# Altium PCB ESP_32_finalls_ss.PcbDoc
Units mil, origin at the board's own origin, x right, y up, seen from the top; angles counter-clockwise.
Board outline 1574.8 x 1574.8 mil, 2 copper layers (Top Layer, Bottom Layer); 58 components, 45 nets, 209 pads, 217 vias.
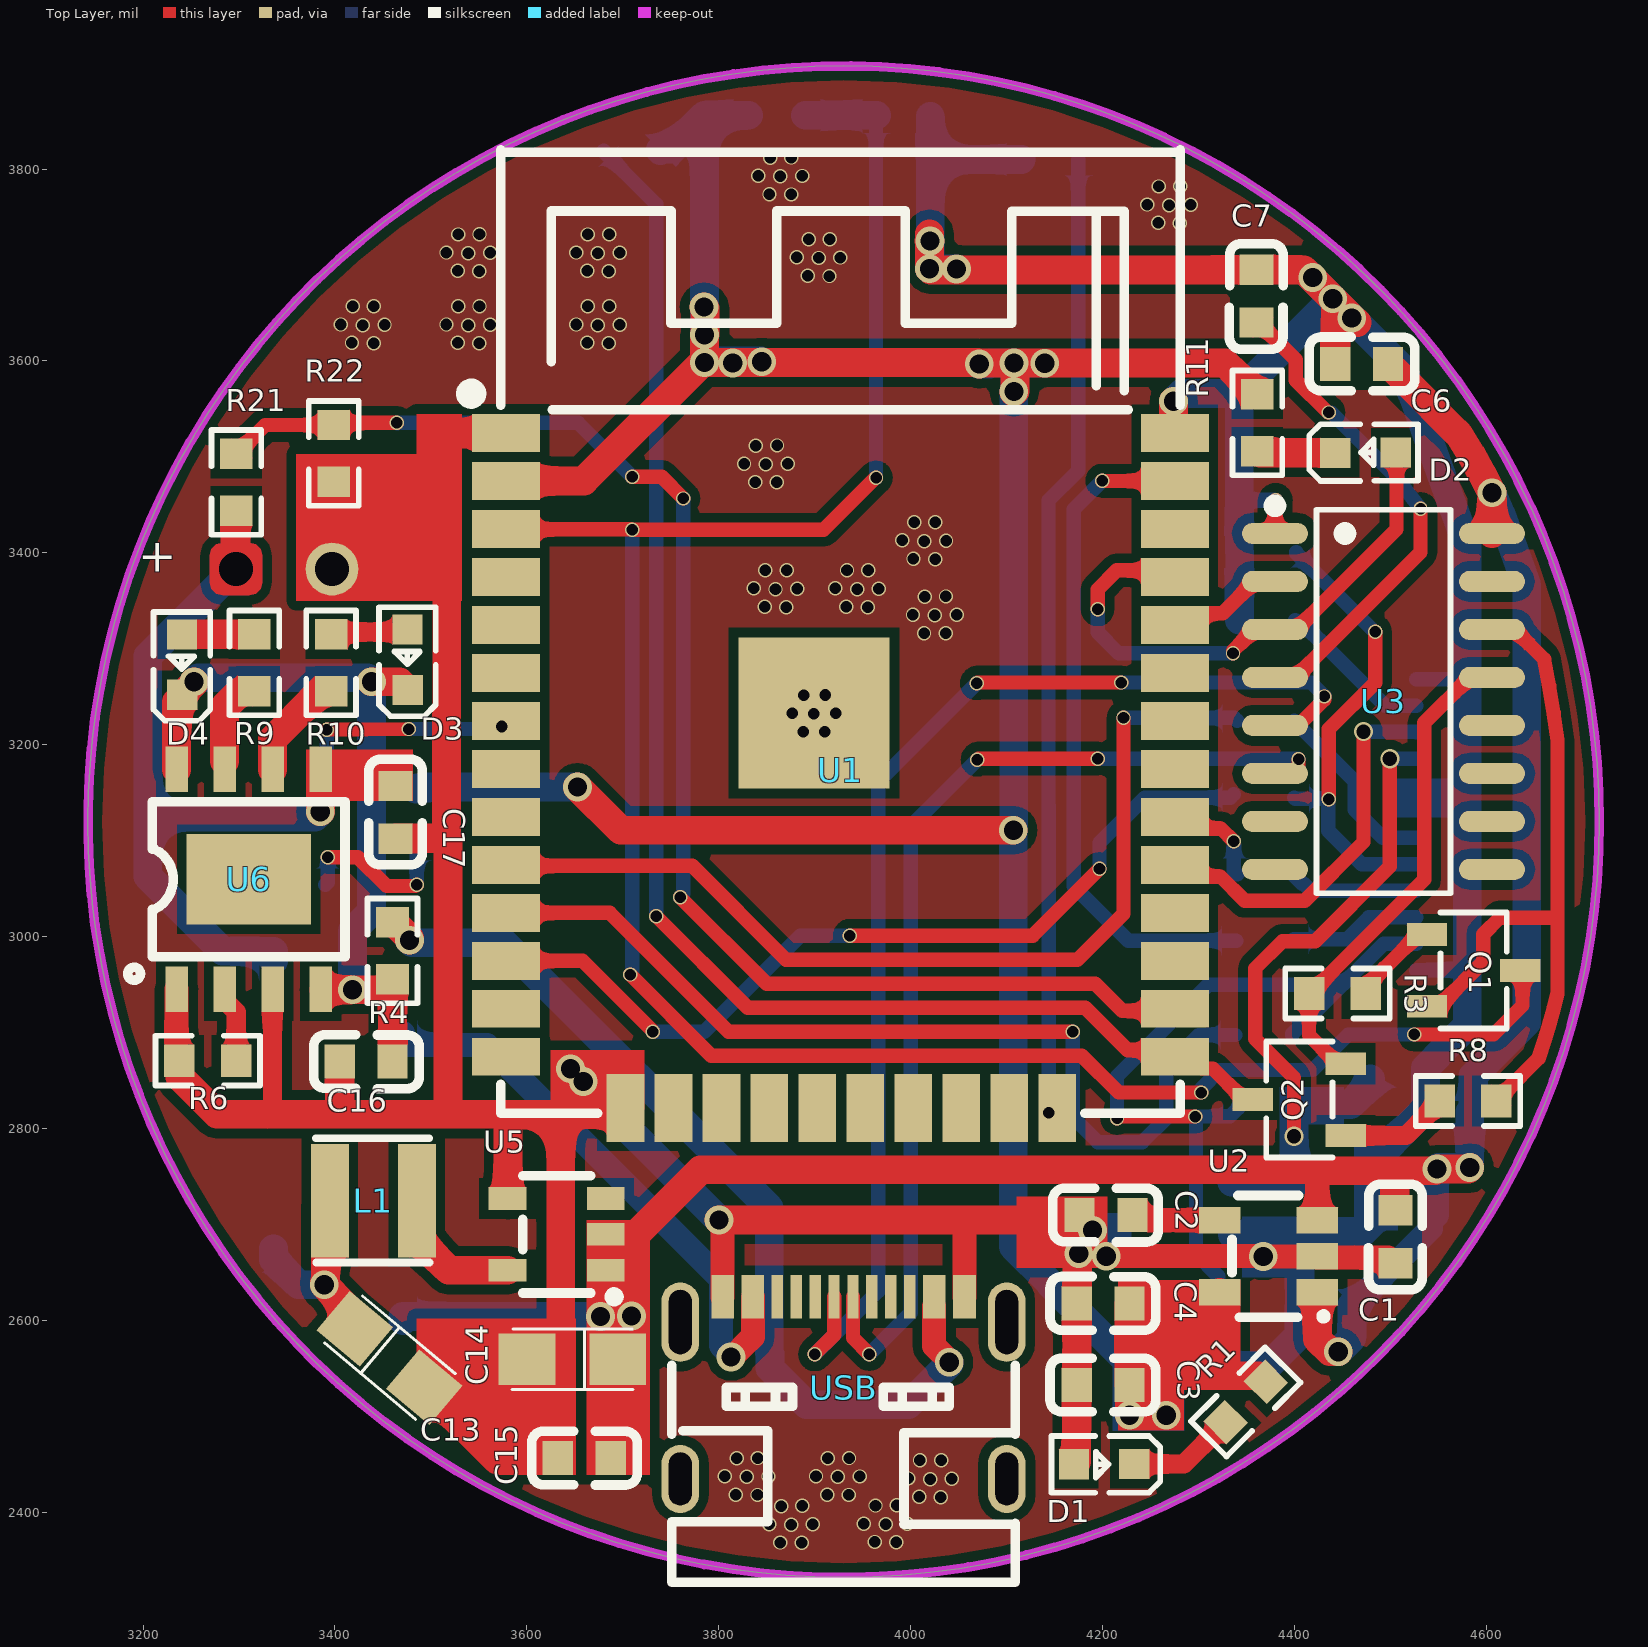
[diagram p0: Top Layer view]
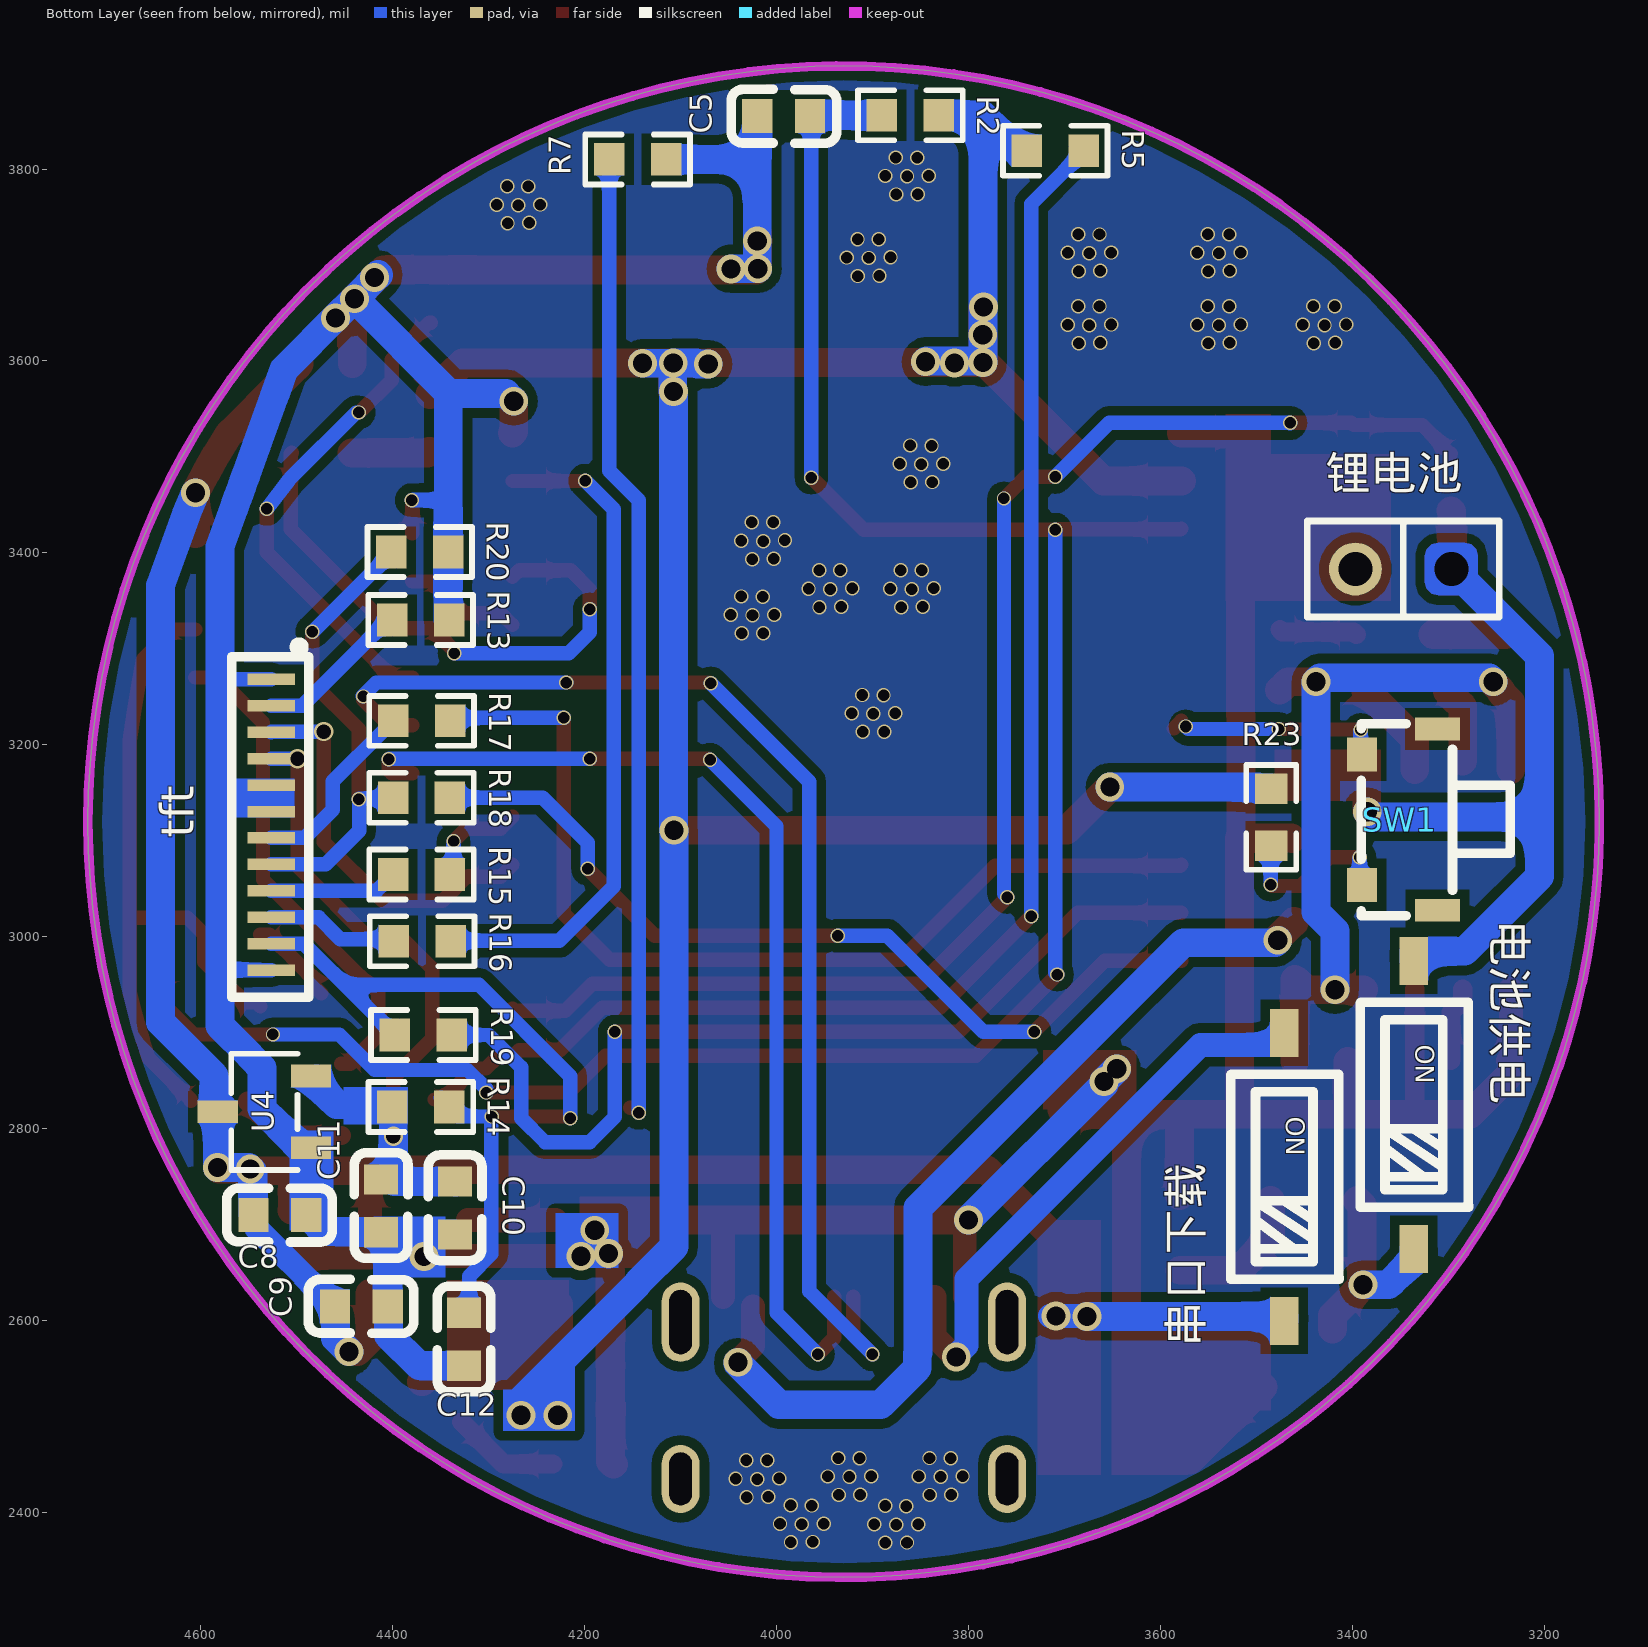
[diagram p1: Bottom Layer view, seen from below]

## Layer stack, top to bottom
Top Solder: solder mask 0.4, Solder Resist, Dk 3.5
Top Layer: signal copper 1.4
Dielectric 1: dielectric 12.6, FR-4, Dk 4.8
Bottom Layer: signal copper 1.4
Bottom Solder: solder mask 0.4, Solder Resist, Dk 3.5

## Board outline
3142.6,3120 ccw(c3930,3120) 3930,2332.6 ccw(c3930,3120) 4717.4,3120 ccw(c3930,3120) 3930,3907.4 ccw(c3930,3120)

## Design rules (kind name [scope] priority, off if disabled: settings)
Clearance [All] p1: gap=10 ignorepadtopadclearanceinfootprint=FALSE except(0: Arc-Hole Track-Hole SMDPad-Hole THPad-Hole Via-Hole Fill-Hole Poly-Hole Region-Hole Text-Hole)
PolygonConnect [All] p1: connectstyle=Relief reliefconductorwidth=10 reliefentries=4 polygonreliefangle="90 Angle" airgapwidth=10
RoutingVias [All] p1: holewidth=28 width=50 viastyle="Through Hole" minholewidth=28 minwidth=50 maxholewidth=28 maxwidth=50
SolderMaskExpansion [All] p1: expansion=4 istentingtop=FALSE
Width [All] p1: maxlimit=100 minlimit=5 preferedwidth=15 minimp=50.000000 maximp=50.000000 favimp=50.000000
30 further rules are at their usual default settings.

## Components (designator, comment, footprint, x,y, rotation, side; value= is the part's Value field where it differs from the comment)
C1 "Cap" 0603C 4502.95,2692.23 r90 top locked value=10uF
C2 "Cap" 0603C 4207.89,2712.05 r0 top value=103
C3 "Cap" 0603C 4205,2535 r0 top value=104
C4 "Cap" 0603C 4205,2620 r0 top value=10uF
C5 "Cap" 0603C 3997.22,3852.95 r0 bottom value=104
C6 "Cap" 0603C 4465,3595 r180 top value=104
C7 "Cap" 0603C 4357.95,3672.22 r90 top value=103
C8 "Cap" 0603C 4512.77,2712.05 r180 bottom value=106
C9 "Cap" 0603C 4427.9,2617.05 r180 bottom value=104
C10 "Cap" 0603C 4332.95,2712.78 r270 bottom value=106
C11 "Cap" 0603C 4410,2715 r270 bottom value=104
C12 "Cap" 0603C 4323.64,2576.04 r270 bottom locked value=104
C13 "Cap Pol1" 钽电容10uf 3460,2560 r320 top value=10uf
C14 "Cap Pol1" 钽电容10uf 3644.01,2558.86 r180 top value=10uf
C15 "Cap" 0603C 3655,2455 r180 top value=0.1uf
C16 "Cap" 0603C 3427.78,2867.95 r180 top value=10uf
C17 "Cap" 0603C 3465,3125 r270 top value=10uf
D1 "LED0" 0603_LED 4200,2455 r180 top
D2 "LED0" 0603_LED 4475,3500 r0 top
D3 "LED0" 0603_LED 3480,3290 r90 top
D4 "LED0" 0603_LED 3245,3285 r90 top locked
L1 "22uH  350mA" L3.0W3.0-22uH 3440,2725 r180 top value=22uH
Q1 "S8050" S8050 4586.06,2965.48 r180 top locked
Q2 "S8050" S8050 4405,2830 r0 top locked
R1 "Res1" 0603R 4350,2515 r45 top locked value=1K
R2 "Res1" 0603R 3860,3855 r180 bottom value=5K
R3 "Res1" 0603R 4445,2940 r0 top value=12K
R4 "Res1" 0603R 3461.01,2985.81 r90 top value=0.4R
R5 "Res1" 0603R 3710,3820 r0 bottom value=5K
R6 "Res1" 0603R 3267.89,2870.04 r0 top value=2.4k
R7 "Res1" 0603R 4144.19,3808.99 r180 bottom value=5K
R8 "Res1" 0603R 4580,2830 r180 top locked value=12K
R9 "Res1" 0603R 3315,3285 r270 top locked value=1K
R10 "Res1" 0603R 3395,3285 r270 top value=1K
R11 "Res1" 0603R 4360,3535 r270 top value=470R
R13 "Res1" 0603R 4371.21,3331.09 r0 bottom value=2R
R14 "Res1" 0603R 4371.05,2823.69 r0 bottom locked value=10K
R15 "Res1" 0603R 4369.4,3063.93 r180 bottom value=1K
R16 "Res1" 0603R 4368.78,2994.46 r180 bottom value=1K
R17 "Res1" 0603R 4369.19,3223.99 r180 bottom value=1K
R18 "Res1" 0603R 4369.41,3143.99 r180 bottom value=1K
R19 "Res1" 0603R 4367.38,2896.75 r180 bottom value=1K
R20 "Res1" 0603R 4372.19,3401.93 r0 bottom value=51K
R21 "Res1" 0603R 3296.21,3473.06 r270 top value=3.9K
R22 "Res1" 0603R 3399.72,3504.11 r90 top value=1K
R23 "Res1" 0603R 3483.54,3125 r90 bottom value=5K
SW1 "TS-KG86E-ACT35F" switch 3335.75,3123.39 r270 bottom locked
tft "1.28tft 240*240-SPI" 1.28tft_12P 4642.38,3147 r270 bottom locked
U1 "ESP32_Core" ESP32-WROOM-32 3899.03,3241.39 r0 top locked
U2 "CAT6219-330TDGT3" CAT6219-330TD 4370,2665 r0 top locked
U3 "CH340C" CH340C 4490,3260 r270 top locked
U4 "XC6206P332MR_C5446" XC6206P332MR 4538.31,2817.12 r180 bottom locked
U5 "ME2188C50M5G" R-ME2188C50M5G 3640,2690 r0 top
U6 "TP4056_C725790" TP4056 3304.01,3056.88 r0 top
USB "TYPEC-304-ACP16" TYPE-C-16P 3941.3,2492.75 r0 top locked
串口下载 "DSHP01TSGER" dial_1 3470,2750 r180 bottom (schematic designator dial_2)
电池供电 "DSHP01TSGER" dial_1 3335,2825 r180 bottom (schematic designator dial_1)
锂电池 "CON2" SIP-2 3351.87,3388.23 r0 bottom (schematic designator J1)

## Footprints (in the part's own frame and the unit in brackets; to place one, negate y for a bottom-side part, rotate by r counter-clockwise, add the part's x,y. Pads: shape width x height; smd on the part's side, far side on the other; paste and mask are expansions set on the pad)
1.28tft_12P [mm]
  rect 0.3x1.25 smd paste+0 mask+0.05: 1(-3.08,2.944) 2(-2.382,2.944) 3(-1.682,2.944) 4(-0.979,2.944) 5(-0.28,2.944) 6(0.419,2.944) 7(1.115,2.944) 8(1.813,2.944) 9(2.512,2.944) 10(3.216,2.944) 11(3.914,2.944) 12(4.614,2.944)
  silkscreen extent -4.06,1.9 5.33,3.94
0603_LED [mm]
  rect 0.8x0.8 smd: 1(-0.834,0.107) 2(0.765,0.114)
  silkscreen extent -1.52,-0.64 1.36,0.87
0603C [mm]
  rect 0.8x0.9 smd: 1(-0.819,-0.052) 2(0.582,-0.052)
  silkscreen extent -1.52,-0.76 1.27,0.66
0603R [mil]
  rect 31.75x34.02 smd paste-3937.01 mask+2: 1(-30.13,1.01) 2(29.19,1.01)
  silkscreen extent -55,-25 54,27
CAT6219-330TD [mm]
  rect 1.1x0.7 smd: 1(1.36,-0.897) 2(1.36,0.053) 3(1.36,1.005) 4(-1.228,1.005) 5(-1.228,-0.895)
  silkscreen extent -0.9,-1.6 1.59,1.66
CH340C [mm]
  oval 0.56x1.745 smd: 1(-4.071,-2.81) 2(-2.801,-2.81) 3(-1.531,-2.81) 4(-0.261,-2.81) 5(1.009,-2.81) 6(2.279,-2.81) 7(3.549,-2.81) 8(4.819,-2.81) 9(4.819,2.934) 10(3.549,2.934) 11(2.279,2.934) 12(1.009,2.934) 13(-0.261,2.934) 14(-1.531,2.934) 15(-2.801,2.934) 16(-4.071,2.934)
  silkscreen extent -4.95,-2.96 5.45,1.83
dial_1 [mm]
  rect 0.76x1.27 smd paste+0 mask+0.05: 1(-0.024,3.81) 2(-0.024,-3.81)
  silkscreen extent -1.44,-2.71 1.43,2.71
ESP32-WROOM-32 [mm]
  rect 1.8x1.001 smd: 1(-8.152,7.204) 2(-8.152,5.934) 3(-8.152,4.664) 4(-8.152,3.394) 5(-8.152,2.124) 6(-8.152,0.854) 7(-8.152,-0.416) 8(-8.152,-1.686) 9(-8.152,-2.956) 10(-8.152,-4.226) 11(-8.152,-5.496) 12(-8.152,-6.766) 13(-8.152,-8.036) 14(-8.152,-9.306) 25(9.55,-9.306) 26(9.55,-8.036) 27(9.55,-6.766) 28(9.55,-5.496) 29(9.55,-4.226) 30(9.55,-2.956) 31(9.55,-1.686) 32(9.55,-0.416) 33(9.55,0.854) 34(9.55,2.124) 35(9.55,3.394) 36(9.55,4.664) 37(9.55,5.934) 38(9.55,7.204)
  rect 1.001x1.8 smd: 15(-4.991,-10.657) 16(-3.721,-10.657) 17(-2.451,-10.657) 18(-1.181,-10.657) 19(0.089,-10.657) 20(1.359,-10.657) 21(2.629,-10.657) 22(3.899,-10.657) 23(5.169,-10.657) 24(6.439,-10.657)
  rect 4x4 smd: 39(-0.001,-0.207)
  silkscreen extent -9.27,-10.8 9.69,14.7
L3.0W3.0-22uH [mm]
  rect 1x3 smd: 1(1.149,-0.004) 2(-1.151,-0.004)
  silkscreen extent -1.49,-1.65 1.52,1.63
R-ME2188C50M5G [mm]
  rect 1x0.6 smd: 1(1.068,-0.95) 2(1.068,0) 3(1.068,0.95) 4(-1.532,0.95) 5(-1.532,-0.95)
  silkscreen extent -1.13,-1.78 1.42,1.55
S8050 [mm]
  rect 1.07x0.6 smd: 1(1.227,-0.938) 2(1.227,0.962) 3(-1.243,0.012)
  silkscreen extent -0.88,-1.52 0.87,1.55
SIP-2 [mil]
  round 0 hole 35.43: 1(-55,5)
  round 55.12 hole 35.43: 2(45,5)
  Top Layer region: -82.56,18.78 -80.71,25.67 -75.67,30.71 -68.78,32.56 -41.22,32.56 -34.33,30.71 -29.29,25.67 -27.44,18.78 -27.44,-8.78 -29.29,-15.67 -34.33,-20.71 -41.22,-22.56 -68.78,-22.56 -75.67,-20.71 -80.71,-15.67 -82.56,-8.78
  Bottom Layer region: -82.56,18.78 -80.71,25.67 -75.67,30.71 -68.78,32.56 -41.22,32.56 -34.33,30.71 -29.29,25.67 -27.44,18.78 -27.44,-8.78 -29.29,-15.67 -34.33,-20.71 -41.22,-22.56 -68.78,-22.56 -75.67,-20.71 -80.71,-15.67 -82.56,-8.78
  silkscreen extent -105,-45 95,55
switch [mm]
  rect 0.9x0.8 smd paste+0 mask+0.05: 1(-1.692,-1.378) 2(1.758,-1.378)
  rect 0.6x1.2 smd paste+0 mask+0.05: 3(-2.367,0.622) 4(2.433,0.622)
  silkscreen extent -2.51,-1.39 2.57,2.54
TP4056 [mm]
  rect 0.6x1.2 smd: 1(-1.753,-2.829) 2(-0.483,-2.829) 3(0.787,-2.829) 4(2.057,-2.829) 5(2.057,2.988) 6(0.787,2.988) 7(-0.483,2.988) 8(-1.753,2.988)
  rect 3.3x2.4 smd: 9(0.152,0.079)
  silkscreen extent -3.05,-2.59 2.7,2.13
TYPE-C-16P [mm]
  rect 0.6x1.15 smd paste-100 mask+0.05: A1B12(-3.491,3.359) A4B9(-2.691,3.359) B1A12(2.909,3.359) B4A9(2.109,3.359)
  rect 0.3x1.15 smd paste-100 mask+0.05: A5(-1.541,3.359) A6(-0.541,3.359) A7(-0.041,3.359) A8(0.959,3.359) B5(1.459,3.359) B6(0.459,3.359) B7(-1.041,3.359) B8(-2.041,3.359)
  oval 1x1.8 hole 0.6 slot 1.4 at 90 deg paste+0 mask+0.05: EP(-4.611,-1.461) EP(4.029,-1.461)
  oval 1x2.1 hole 0.6 slot 1.7 at 90 deg paste+0 mask+0.05: EP(-4.611,2.689) EP(4.029,2.689)
  silkscreen extent -4.84,-4.19 4.26,1.54
XC6206P332MR [mm]
  rect 1.07x0.6 smd: 1(1.354,-0.938) 2(1.354,0.962) 3(-1.116,0.012)
  silkscreen extent -0.76,-1.52 1,1.55
钽电容10uf [mil]
  rect 59.05x53.5 smd: 1(-50.47,-1.14) 2(44.01,-1.14)
  silkscreen extent -66,-33 60,30

## Part data
C1 C2 C3 C4 C5 C6 C7 C8 C9 C10 C11 C12 C15 C16 C17: "Capacitor", LatestRevisionDate=17-Jul-2002, LatestRevisionNote="Re-released for DXP Platform.", PackageDescription="Radial Cap, Thru-Hole; 2 Leads; 0.3 in Pin Spacing", PackageReference=RAD-0.3, Published=8-Jun-2000, Publisher="Altium Limited"
C13 C14: "Polarized Capacitor (Radial)", LatestRevisionDate=17-Jul-2002, LatestRevisionNote="Re-released for DXP Platform.", PackageDescription="Polarized Capacitor (Radial); 2 Leads", PackageReference=RB7.6-15, Published=8-Jun-2000, Publisher="Altium Limited"
D1 D2 D3 D4: "Typical INFRARED GaAs LED", LatestRevisionDate=08-Jul-2005, LatestRevisionNote="Mech Layer 1 removed.", PackageDescription="LED; 2 Leads", PackageReference=LED-0, Published=8-Jun-2000, Publisher="Altium Limited"
L1: library part ABG06A45M220, DC Resistance (DCR)=110mΩ, JLCPCB Part Class="Extended Part", LCSC Part Name="22uH ±20% 1.85A 110mΩ", Manufacturer=Coilank(驰兴电感), Rated Current=1.85A, Tolerance=±20%, Add into BOM=yes, Convert to PCB=yes, Datasheet=https://atta.szlcsc.com/upload/public/pdf/source/20180803/C253595_25210E544AC881D442365BBE1C43CE23.pdf, Device=ABG06A45M220, Manufacturer Part=ABG06A45M220, Name=22uH, Supplier=LCSC, Supplier Footprint=SMD, Supplier Part=C253595, Symbol=ABG06A45M220
Q1 Q2: library part S8050_C105433, Collector Current (Ic)=500mA, Collector Cut-Off Current (Icbo)=100nA, Collector-Emitter Breakdown Voltage (Vceo)=25V, Collector-Emitter Saturation Voltage (VCE(sat)@Ic,Ib)=600mV@500mA,50mA, DC Current Gain (hFE@Ic,Vce)=120@50mA,1V, JLCPCB Part Class="Extended Part", LCSC Part Name="NPN 25V 500mA L档 120-200", Manufacturer=CJ(江苏长电/长晶), Operating Temperature=+150℃@(Tj), Power Dissipation (Pd)=300mW, Transition Frequency (fT)=150MHz, Add into BOM=yes, Convert to PCB=yes, Datasheet=https://atta.szlcsc.com/upload/public/pdf/source/20170415/1492237762328.pdf, Device=S8050_C105433, Manufacturer Part=S8050, Name=S8050, Supplier=LCSC, Supplier Footprint=SOT-23, Supplier Part=C105433, Symbol=S8050_C105433, Transistor Type=NPN
R1 R2 R3 R4 R5 R6 R7 R8 R9 R10 R11 R13 R14 R15 R16 R17 R18 R19 R20 R21 R22 R23: "Resistor", LatestRevisionDate=17-Jul-2002, LatestRevisionNote="Re-released for DXP Platform.", PackageDescription="Axial Device, Thru-Hole; 2 Leads; 0.3 in Pin Spacing", PackageReference=AXIAL-0.3, Published=8-Jun-2000, Publisher="Altium Limited"
SW1: JLCPCB Part Class="Extended Part", Manufacturer=HANBO(汉博), Add into BOM=yes, Convert to PCB=yes, Datasheet=https://atta.szlcsc.com/upload/public/pdf/source/20210816/314DDF736145A1D10B89E80ED474C2FA.pdf, Device=TS-KG86E-ACT35F, LCSC Part Name=TS-KG86E-ACT35F, Manufacturer Part=TS-KG86E-ACT35F, Name=TS-KG86E-ACT35F, Supplier=LCSC, Supplier Footprint=-, Supplier Part=C2874419, Symbol=TS-KG86E-ACT35F
U2: Dropout Voltage=500mV@(500mA), JLCPCB Part Class="Extended Part", LCSC Part Name="输入5.5V 输出3.3V 500mA", Manufacturer=onsemi(安森美), Maximum Input Voltage=5.5V, Output Current=500mA, Output Voltage=3.3V, Power Supply Rejection Ratio (PSRR)=64dB, Add into BOM=yes, Convert to PCB=yes, Datasheet=https://atta.szlcsc.com/upload/public/pdf/source/20181211/C255621_E1C92A84280A25A34B7AFA26C33FFBB6.pdf, Device=CAT6219-330TDGT3, Manufacturer Part=CAT6219-330TDGT3, Name=CAT6219-330TDGT3, Number of Outputs=1, Output Polarity=正, Output Type=固定, Supplier=LCSC, Supplier Footprint=TSOT-23-5, Supplier Part=C255621, Symbol=CAT6219-330TDGT3
U3: JLCPCB Part Class="Extended Part", LCSC Part Name="CH340C USB转串口芯片 CH340", Manufacturer=WCH(南京沁恒), Supply Voltage=3.3V；5V, Add into BOM=yes, Applications Function=收发器, Convert to PCB=yes, Data Rate=2Mbps, Datasheet=https://atta.szlcsc.com/upload/public/pdf/source/20200819/C84681_ADBED554CE321879DBD6B1D06488689C.pdf, Device=CH340C, Manufacturer Part=CH340C, Name=CH340C, Protocol="USB 2.0", Supplier=LCSC, Supplier Footprint=SOP-16, Supplier Part=C84681, Symbol=CH340C
U4: Dropout Voltage=680mV@(100mA), JLCPCB Part Class="Basic Part", LCSC Part Name=XC6206P332MR, Manufacturer=TOREX(特瑞仕), Maximum Input Voltage=6V, Output Current=200mA, Output Voltage=3.3V, Power Supply Rejection Ratio (PSRR)=-, Add into BOM=yes, Convert to PCB=yes, Datasheet=https://atta.szlcsc.com/upload/public/pdf/source/20130801/1457706628791.pdf, Device=XC6206P332MR_C5446, Manufacturer Part=XC6206P332MR, Name=XC6206P332MR, Number of Outputs=1, Output Polarity=正, Output Type=固定, Supplier=LCSC, Supplier Footprint=SOT-23-3L, Supplier Part=C5446, Symbol=XC6206P332MR
U5: Input Voltage=0.9V~5V, JLCPCB Part Class="Extended Part", LCSC Part Name="升压型 Vin=0.9V~5V Vout=5V 300mA", Manufacturer=MICRONE(南京微盟), Output Current (Max)=300mA, Output Voltage=5V, Switching Frequency=320kHz, Add into BOM=yes, Convert to PCB=yes, Datasheet=https://atta.szlcsc.com/upload/public/pdf/source/20180904/C236768_E7AD8C2FE568D006CA38E8CDC667E81C.pdf, Device=ME2188C50M5G, Function=升压型, Manufacturer Part=ME2188C50M5G, Name=ME2188C50M5G, Number of Outputs=1, Supplier=LCSC, Supplier Footprint=SOT-23-5, Supplier Part=C236768, Symbol=ME2188C50M5G, Synchronous Rectification=是, Topology=升压式
U6: JLCPCB Part Class="Extended Part", LCSC Part Name=TP4056, Manufacturer=UMW(友台半导体), Add into BOM=yes, Convert to PCB=yes, Datasheet=https://atta.szlcsc.com/upload/public/pdf/source/20211011/37515E71BA298E23D23475482C49633D.pdf, Device=TP4056_C725790, Manufacturer Part=TP4056, Name=TP4056, Supplier=LCSC, Supplier Footprint=ESOP-8, Supplier Part=C725790, Symbol=TP4056_C725790
USB: Current Rating - Power (Max)=3A, JLCPCB Part Class="Extended Part", LCSC Part Name="Type-C 母座 卧贴", Manufacturer=XUNPU(讯普), Operating Temperature Range=-40℃~+85℃, Add into BOM=yes, Connector Type=Type-C, Convert to PCB=yes, Device=TYPEC-304-ACP16, Gender=母座, Manufacturer Part=TYPEC-304-ACP16, Mounting Style=卧贴, Name=TYPEC-304-ACP16, Number of Contacts=16, Number of Ports=1, Supplier=LCSC, Supplier Footprint=SMD, Supplier Part=C2982555, Symbol=TYPEC-304-ACP16
串口下载 电池供电: JLCPCB Part Class="Extended Part", LCSC Part Name="1位单PIN 1.27mm间距贴片型 KE拨码开关 编码开关", Manufacturer=康深, Add into BOM=yes, Convert to PCB=yes, Datasheet=https://atta.szlcsc.com/upload/public/pdf/source/20220713/BDDC0447A52B6A23E8804DA200FD4C7C.pdf, Device=DSHP01TSGER, Manufacturer Part=DSHP01TSGER, Name=DSHP01TSGER, Supplier=LCSC, Supplier Footprint=SMD,2.9x5.4mm, Supplier Part=C3293141, Symbol=DSHP01TSGER
锂电池: library part "Header 2H", "Header, 2-Pin, Right Angle", LatestRevisionDate=17-Jul-2002, LatestRevisionNote="Re-released for DXP Platform.", Publisher="Altium Limited"

## Via types
v1: diameter 15, hole 12, Top Layer to Bottom Layer, 173 vias
v2: diameter 30, hole 20, Top Layer to Bottom Layer, 41 vias
v3: diameter 20, hole 15, Top Layer to Bottom Layer, 3 vias

## Nets (pads, with @x,y where several pads share a name; then routed paths per layer and width w, separated by ;. In a path a pad name is that pad's centre, name@x,y a point inside that pad or via, vN(x,y) a via of type N, cw(c..) or ccw(c..) an arc to the next point about the centre after c; other vN are vias at no path point)
+3.3V_S: C10.1 C11.1 R14.2 tft.4 U4.2 | length 715.3
  Top Layer w15: v3(4399.16,2792.29) 4399.16,2853.29 4358.62,2893.84 4358.62,2966.99 4387.19,2995.57 4421.43,2995.57 4499.11,3073.24 v3(4499.11,3185.51)
  Bottom Layer w15: v3(4499.11,3185.51) tft.4
  Bottom Layer w30: C10.1@4334.25,2744.25 C10.1 4398.02,2745 4399.16,2746.14 v3(4399.16,2792.29) v3@4399.44,2792.01 ; v3@4399.32,2792.29 4399.32,2821.76 R14.2 ; C11.1@4409.33,2747.97 4410.08,2747.22 C11.1 ; 4440,2825 4458.17,2825 4478.94,2845.76 U4.2@4478.94,2851.81
ADC1: R21.1 R22.2 U1.26 | length 1495.3
  Top Layer w15: R21.1 3298.35,3503.18 3306.73,3511.56 3306.73,3512.69 3327.34,3533.3 R22.2 3400.89,3535.48 v1(3464.52,3535.48) ; v1(3709.55,3479.21) 3740.53,3479.21 v1(3763,3456.74) ; v1(3759.55,3041.46) 3759.55,3041.32 3849.75,2951.12 4191.96,2951.12 4220.19,2922.89 4272.89,2922.89 U1.26
  Bottom Layer w15: v1@3465,3535 v1(3464.52,3535.48) 3653.28,3535.48 v1(3709.55,3479.21) ; v1(3759.55,3041.46) 3763,3044.9 v1(3763,3456.74)
BAT+: C17.1 R21.2 U6.5 电池供电.1 锂电池.1 | length 846.8
  Top Layer w15: 3414.31,3157.01 3425.64,3168.33
  Top Layer w30: 3291.43,3388.67 锂电池.1 3296.39,3383.71 3296.39,3443.03 R21.2 ; v2(3384.59,3130.32) 3385,3130.73 3385,3156.67 3388.33,3160 3405,3160
  Bottom Layer w30: 锂电池.1 3295.66,3383.23 3205,3292.57 3205,3125 ; 电池供电.1 3335.95,2984.96 3335.91,2985 3283.07,2985 3205,3063.07 3205,3125 ; v2(3384.59,3130.32) 3379.27,3125 3205,3125
BL: tft.3 U1.29 | length 407.7
  Top Layer w15: U1.29 4287.2,3062.8 4322.57,3062.8 4347.86,3037.51 4410.27,3037.51 4471.61,3098.85 v3(4471.61,3213.84)
  Bottom Layer w15: v3(4471.61,3213.84) 4471.91,3213.54 4526.18,3213.54 tft.3
CS: R18.2 U1.12 | length 907.7
  Top Layer w15: U1.12 3657.93,2975 3731.26,2901.67 v1(3731.26,2901.15) ; v1(3936.33,3001.12) 4126.81,3001.12 v1(4196.55,3070.86)
  Bottom Layer w15: v1(3731.26,2901.15) 3784.73,2901.15 3884.7,3001.12 v1(3936.33,3001.12) ; v1(4196.55,3070.86) 4196.55,3097.94 4243.61,3145 4332.67,3145 R18.2@4336.45,3148.78
CS_T: R18.1 R20.2 tft.8 | length 487.9
  Top Layer w15: v1(4435.4,3143.35) 4435.4,3216.52 4483.74,3264.86 v1(4483.74,3318.05)
  Bottom Layer w15: R18.1 4400.47,3144.07 4434.68,3144.07 v1(4435.4,3143.35) 4434.79,3142.75 4434.79,3110.48 4469.65,3075.62 tft.8 ; R20.2 4401.38,3399.79 4483.12,3318.05 v1(4483.74,3318.05)
D+: U3.5 USB.A6 | length 1272.3
  Top Layer w5: 3919.68,2585 3920,2585.32
  Top Layer w15: v1(3900,2565) 3900,2565.32 3919.68,2585 ; 3920,2585.32 USB.A6 ; v1(4068.57,3264.15) 4069.4,3264.98 v1(4219.11,3264.98) ; U3.5 4403.78,3220.26 4430.53,3247.01 v1(4430.53,3250.43)
  Bottom Layer w15: v1(3900,2565) 3965.93,2630.93 3965.93,3161.51 v1(4068.57,3264.15) ; v1(4219.11,3264.98) 4416.97,3264.98 4431.03,3250.92 v1(4430.53,3250.43)
D-: U3.6 USB.A7 | length 1105.6
  Top Layer w15: USB.A7 3939.68,2582.32 v1(3956.77,2565.22) ; v1(4069.24,3184.49) 4070.49,3185.74 v1(4194.58,3185.74) ; U3.6 4400.67,3170.26 4403.92,3173.52 v1(4403.92,3185.04)
  Bottom Layer w15: v1(3956.77,2565.22) 4000.02,2608.46 4000.02,3115.27 v1(4069.24,3184.49) ; v1(4194.58,3185.74) 4194.78,3185.53 4403.43,3185.53 v1(4403.92,3185.04)
DC: R17.2 U1.10 | length 1028
  Top Layer w15: U1.10 3579.19,3073.92 3772.11,3073.92 3869.91,2976.12 4173.57,2976.12 4221.55,3024.1 v1(4221.55,3228.1)
  Bottom Layer w15: v1(4221.55,3228.1) 4336.9,3228.1 R17.2
DC_T: R17.1 tft.7 | length 195.7
  Bottom Layer w15: R17.1 4399.32,3223.87 4407.7,3215.49 4408.83,3215.49 4462.34,3161.98 4462.34,3132.3 4491.52,3103.12 tft.7
DTR: Q2.2 R3.1 U3.13 | length 518.9
  Top Layer w15: R3.1 R3.1@4414.87,2942.14 ; Q2.2 4444.06,2867.88 4439.75,2872.19 4439.75,2872.47 4414.87,2897.35 R3.1@4414.87,2942.14 ; U3.13 4582.2,3270.26 4535,3223.06 4535,3059.8 4425.71,2950.52 4423.25,2950.52 R3.1@4414.87,2942.14
EN: C5.1 Q1.3 R2.1 U1.3 | length 2382
  Top Layer w15: U1.3 3578.61,3424.5 3709.33,3424.5 v1(3709.55,3424.27) 3909.03,3424.27 3963.23,3478.47 v1(3963.72,3478.47) ; v1(3707.55,2960.74) 3792.17,2876.12 4178.14,2876.12 4216.46,2837.8 v1(4302.5,2837.8) ; v1(4524.63,2898.29) 4607.06,2898.29 4637.31,2928.54 4637.31,2960.69 4635,2963 Q1.3
  Bottom Layer w15: v1(3707.55,2960.74) 3709.55,2962.75 v1(3709.55,3424.27) ; v1(3963.72,3478.47) 3963.72,3853.72 C5.1 ; v1(4302.5,2837.8) 4302.5,2841.9 4321.91,2861.31 4418.69,2861.31 4455.67,2898.29 v1(4524.63,2898.29)
  Bottom Layer w30: R2.1 C5.1@3964.25,3856.01
GND: C1.1 C2.1 C3.1 C4.1 C5.2 C6.2 C7.2 C8.2 C9.2 C10.2 C11.2 C12.2 C13.2 C14.2 C15.2 C16.2 C17.2 D1.2 R6.1 R7.2 R13.1 R20.1 R22.1 tft.1 tft.5 tft.6 tft.12 U1.1 U1.15 U1.38 U2.2 U3.1 U4.1 U5.4 U6.1 U6.3 USB.A1B12 USB.B1A12 锂电池.2 | length 6772.4
  Top Layer w15: U3.1 4379.35,3454.35 v1(4380,3455)
  Top Layer w20: 3330,2815.09 3335,2820.09 U6.3
  Top Layer w25: U6.1 3234.79,2945.29 3234.79,2874.02 R6.1 ; USB.A1B12 v2@3803.85,2701.15 ; USB.B1A12 4055.82,2704.18 ; v2(4175,2670) 4176.35,2670 4178.09,2668.26 4202.6,2668.26 v2(4203.55,2667.31) 4366.99,2667.26 4367.16,2667.09 U2.2 ; U2.2@4423.54,2665.96 4497.07,2665.96 4503.03,2660 C1.1
  Top Layer w30: 3238.63,2853.65 3277.2,2815.09 3330,2815.09 3405,2815.09 ; R22.1 3399.84,3473.98 3442.29,3431.54 ; C16.2 3404.88,2815.21 3405,2815.09 ; 锂电池.2@3405,3388.06 3403.63,3389.43 3403.63,3392.88 3442.29,3431.54 ; 3445.96,3426.45 3455.98,3426.45 3517.43,3487.9 ; C17.2 3463.7,3102.85 3517.67,3102.85 3517.67,2815.09 ; C13.2 3529.87,2493.94 ; 3510,3525 U1.1 ; 3516.1,3102.85 3516.1,3230.65 3516.52,3231.06 3516.52,3357.31 3442.29,3431.54 ; U5.4@3580.25,2730.59 3580.25,2810.34 3585,2815.09 ; C15.2 3632.11,2455.53 3631.36,2454.78 3569.04,2454.78 3529.87,2493.94 ; v2(3645.51,2862.61) 3661.75,2846.37 3661.75,2815.09 ; U1.15 3702.55,2819.79 3697.85,2815.09 3661.75,2815.09 ; v2@3803.85,2701.15 v2(3800,2705) 4055,2705 ; v2@4019.01,3725 v2(4020,3725) ; v2@4019.5,3732.5 v2(4019.5,3696.17) 4020.75,3694.93 4359.81,3694.93 C7.2 4409.31,3695.12 v2(4439.55,3664.88) v2@4442.1,3662.32 ; 4055.82,2704.18 4055,2705 ; D1.2 4172.8,2453.42 4172.8,2530.24 C3.1 4173.07,2533.25 4173.07,2617.66 C4.1 4173.42,2618.59 4173.42,2691.28 4174.13,2692 4174.13,2704.25 4174.88,2705 4055,2705 ; v2(4273.79,3558) 4273.79,3526.21 U1.38 ; C6.2 v2@4442.1,3662.32 ; v2@4465,3640 4464.43,3640 v2@4442.1,3662.32 ; 3405,2815.09 3517.67,2815.09 ; 3517.67,2815.09 3585,2815.09 ; 3529.87,2493.94 3531.16,2493.94 3597.22,2560 C14.2 3602.78,2560 3614.53,2571.75 3614.53,2574.53 3635.21,2595.21 3635.21,2815.09 ; 3585,2815.09 3635.21,2815.09 ; 3635.21,2815.09 3661.75,2815.09
  Bottom Layer w15: v2@4197.22,2683.52 4203.55,2677.18 v2(4203.55,2667.31) ; 4342.06,3455 v1(4380,3455) ; v2(4367.15,2667.1) 4372.8,2667.1 4382.5,2676.8 ; tft.12 4579.81,2965.35 ; tft.1 4578.08,3268.27 4579.81,3270
  Bottom Layer w30: v2(3645.51,2862.61) v2@3658.76,2849.37 ; v2@3658.76,2849.51 3658.76,2846.24 v2(3800,2705) ; C5.2 4020.12,3810 ; v2@4047.49,3696.17 v2(4019.5,3696.17) 4020.12,3696.79 4020.12,3810 ; R7.2 4020.12,3810 ; v2@4175,2669.61 v2(4175,2670) 4185.8,2680.8 v2@4185.8,2694.4 ; v2(4273.79,3558) 4281.85,3566.07 4340.74,3566.07 ; C12.2 4372.31,2553.15 4404.25,2585.09 4404.25,2614.25 C9.2 4405,2687.03 C11.2@4408.29,2690.32 ; C10.2 4335.44,2690.32 C11.2@4408.29,2690.32 ; R13.1@4342.27,3330 4342.6,3330.33 4342.6,3400.37 R20.1 4342.06,3455 4342.06,3564.75 4340.74,3566.07 ; C11.2 4410.08,2692.11 C11.2@4408.29,2690.32 ; v2@4415,3690 4414.71,3689.71 v2(4439.55,3664.88) ; C11.2@4428.43,2692.85 4471.56,2692.85 4485.99,2707.28 4489.13,2707.28 4489.88,2708.03 C8.2 4489.88,2746.18 ; 4484.46,2746.18 4484.46,2775.61 4492.34,2783.49 4498.69,2783.49 4536.19,2820.99 4536.19,2863.34 4548.31,2875.47 4548.31,2876.03 4579.81,2907.53 4579.81,2965.35 4579.81,3270 4579.81,3406.52 4565.32,3446.63 4563.53,3451.57 4561.26,3457.86 4559.14,3463.73 4556.92,3469.88 4555.13,3474.82 4553.75,3478.65 4552.9,3480.99 4552.86,3481.11 4541.7,3511.98 4523.52,3562.32 4521.73,3567.26 4513,3591.43 4508.27,3596.16 4459.49,3644.94 v2(4439.55,3664.88) ; U4.1 U4.1@4486.69,2780.2 ; 4340.74,3566.07 v2(4439.55,3664.88)
  other v2: 4189.28,2694.4 3658.76,2849.16 4459.41,3644.86 4418.7,3687.08 4047.49,3695.94
GPIO0: Q2.3 R5.1 U1.25 | length 1504.1
  Top Layer w15: v1(3734.55,3021.63) 3830.07,2926.12 4181.61,2926.12 4225.85,2881.87 4268.13,2881.87 U1.25 ; U1.25@4291.57,2874.16 4302.93,2862.8 4314.63,2862.8 4342.5,2834.93 4342.5,2834.79 4346.81,2830.48 Q2.3
  Bottom Layer w15: R5.1 3679.87,3817.86 3688.25,3809.48 3688.68,3809.48 3734.55,3763.61 v1(3734.55,3021.63)
GPIO2: R7.1 U1.24 | length 1017.3
  Top Layer w15: v1(4143.51,2816.73) 4148.6,2821.82 U1.24
  Bottom Layer w15: v1(4143.51,2816.73) 4143.51,3137.05 4143.41,3137.15 4143.41,3454.78 4174.32,3485.69 R7.1
NetC2_2: C2.2 U2.4 | length 91.8
  Top Layer w25: C2.2@4230,2705 4230.22,2704.78 4321.43,2704.78 U2.4
NetC7_1: C7.1 U3.4 | length 517.2
  Top Layer w15: C7.1 4361.97,3640 4400.85,3601.12 4400.85,3580.09 4434.57,3546.36 v1(4435.29,3546.36) ; U3.4 4400.77,3270.26 4406.2,3275.69 4406.2,3275.87 4531.03,3400.7 v1(4531.03,3445.88)
  Bottom Layer w15: v1(4435.29,3546.36) 4437.88,3546.36 4506.58,3477.66 4507.89,3476.16 v1(4531.03,3445.88)
NetC13_1: C13.1 L1.1 电池供电.2 | length 224.2
  Top Layer w30: L1.1 3390.07,2720.47 3390.07,2641.29 3388.84,2640.06 v2(3388.84,2637.52) 3420.6,2605.76 C13.1
  Bottom Layer w30: 电池供电.2 3335.95,2663.77 3362.2,2637.52 v2(3388.84,2637.52)
NetC16_1: C16.1 D3.1 D4.1 R4.1 U6.4 U6.8 | length 823.8
  Top Layer w20: D4.1 D4.1@3244.89,3256.28
  Top Layer w30: U6.8 3235,3244.68 D4.1@3244.89,3254.57 ; D4.1@3244.89,3256.28 3253.17,3264.56 v2(3253.17,3265.88) ; U6.4@3388.19,2944.86 v2(3418.12,2944.86) 3448.04,2944.86 3457.99,2954.8 3459.12,2954.8 R4.1 C16.1 ; v2(3438.02,3265.83) 3467.1,3265.83 D3.1
  Bottom Layer w30: v2(3253.17,3265.88) 3257.29,3270 3433.85,3270 v2(3438.02,3265.83) 3438.02,3026.01 3418.12,3006.11 v2(3418.12,2944.86)
NetD1_1: D1.1 R1.1 | length 113.2
  Top Layer w20: D1.1 4284.34,2450.77 R1.1
NetD2_1: D2.1 R11.2 | length 81.8
  Top Layer w30: R11.2 4362.14,3505.81 4363.72,3504.23 D2.1
NetD3_2: D3.2 R10.1 | length 81.6
  Top Layer w20: R10.1 3398.51,3317.63 3473,3317.63 D3.2
NetD4_2: D4.2 R9.1 | length 75.5
  Top Layer w30: D4.2 R9.1
Netdial_2_1: USB.A4B9 串口下载.1 | length 602.1
  Top Layer w25: v2(3812.72,2562.3) 3814.08,2562.3 3831.64,2579.86 3832.17,2579.86 3835.35,2583.05 USB.A4B9
  Bottom Layer w25: 串口下载.1 3470.95,2889.96 3473.41,2887.5 3558.13,2887.5 3801.95,2643.69 3801.95,2574.43 3812.72,2563.65 v2(3812.72,2562.3)
NetL1_2: L1.2 U5.5 | length 147.5
  Top Layer w30: L1.2 3485.32,2685.79 3490,2681.1 3490.13,2681.1 3518.63,2652.6 U5.5
NetQ1_1: Q1.1 R3.2 | length 93.1
  Top Layer w15: R3.2 4482.57,2949.38 4482.57,2956.47 4528.5,3002.4 Q1.1
NetQ2_1: Q2.1 R8.2 | length 113
  Top Layer w20: Q2.1 4516.03,2793.08 4550.81,2827.86 R8.2
NetR6_2: R6.2 U6.2 | length 79.5
  Top Layer w20: U6.2 3285,2933.69 3297.08,2921.61 3297.08,2878.05 R6.2
NetR9_2: R9.2 U6.7 | length 79.4
  Top Layer w30: U6.7@3284.89,3183.12 3284.89,3239.69 R9.2@3301.01,3255.81
NetR10_2: R10.2 U6.6 | length 103.1
  Top Layer w30: U6.6 3335,3205.93 3338.19,3209.12 3384,3254.93 3385.13,3254.93 R10.2@3386.01,3255.81
NetR13_2: R13.2 tft.2 | length 163.7
  Bottom Layer w15: R13.2 4400.4,3328.95 4408.78,3320.57 4414.43,3320.57 4461.45,3273.55 4494.23,3240.77 tft.2
NetR23_1: R23.1 SW1.2 | length 176.2
  Top Layer w15: v1(3392.46,3082.98) 3423.86,3082.98 3453.88,3052.96 3483.7,3052.96 v1(3485.14,3054.4)
  Bottom Layer w15: SW1.2 3392.46,3056.64 v1(3392.46,3082.98) ; R23.1 3485.14,3094.28 v1(3485.14,3054.4)
RST: R19.2 U1.11 | length 988.2
  Top Layer w15: U1.11 3686.1,3025 3809.98,2901.12 v1(4168.51,2901.12)
  Bottom Layer w15: v1(4168.51,2901.12) 4168.51,2812.37 4194.7,2786.18 4241.18,2786.18 4266,2811 4266,2863.94 4299.81,2897.76 R19.2
RST_T: C12.1 R14.1 R19.1 tft.11 | length 848.9
  Top Layer w15: v1(4214.79,2811.18) 4216.41,2812.8 v1(4296.5,2812.8)
  Bottom Layer w15: v1(4214.79,2811.18) 4214.79,2854.79 4309.97,2949.97 4449.72,2949.97 ; C12.1 4320.15,2613.81 4320.15,2646.52 4297.06,2669.61 4297.06,2812.24 v1(4296.5,2812.8) 4312.86,2812.8 4313.23,2813.17 4332.54,2813.17 4340.92,2821.55 4340.92,2823.81 4349.29,2832.19 R14.1@4350.01,2832.19 ; R19.1 4397.51,2898.89 4405.89,2907.27 4407.02,2907.27 4449.72,2949.97 ; tft.11 4492.64,2992.89 4449.72,2949.97
RTS: Q1.2 R8.1 U3.14 | length 741.1
  Top Layer w15: Q1.2 4542.06,2931.91 4554.46,2931.91 4596.44,2973.89 4596.44,3002.7 4613.81,3020.08 4673.73,3020.08 ; U3.14 4628.86,3320.26 4656.5,3292.62 4659.73,3289.39 cw(c3324.28,3024.46) 4673.73,3204.97 4673.73,3203.97 4673.73,3030.86 4673.73,3020.08 ; R8.1 4610.13,2830.12 4618.5,2838.5 4619.13,2838.5 4654.02,2873.39 ccw(c3933.21,3119.69) 4665.85,2911.2 ccw(c3930,3120) 4673.73,2941.31 4673.73,3020.08
RXD0: U1.34 U3.2 | length 123.1
  Top Layer w15: U1.34 4287.2,3337.2 4324.87,3337.2 4357.93,3370.26 U3.2
SCL: R15.2 U1.30 | length 108.1
  Top Layer w15: U1.30 4287.2,3112.8 4323.15,3112.8 v1(4336.51,3099.46)
  Bottom Layer w15: v1(4336.51,3099.46) 4336.51,3068.64 R15.2
SCL_T: R15.1 tft.9 | length 134.6
  Bottom Layer w15: R15.1 4399.53,3063.8 4407.9,3055.43 4409.35,3055.43 4416.69,3048.08 tft.9
SDA: R16.2 U1.37 | length 703.8
  Top Layer w15: v1(4199.32,3475.32) 4199.64,3475 U1.37
  Bottom Layer w15: v1(4199.32,3475.32) 4169.58,3445.58 4169.58,3052.8 4226.37,2996.01 R16.2@4339.17,2996.01
SDA_T: R16.1 tft.10 | length 136.9
  Bottom Layer w15: R16.1@4398.99,2997.64 4454.41,2997.64 4477,3020.24 4526.33,3020.24 tft.10
SW_1: SW1.1 U1.7 | length 228.5
  Top Layer w15: v1(3391.38,3215.62) v1(3476.9,3216.54) ; v1(3573.79,3219.16) 3578.11,3223.48 U1.7 U1.7@3585.98,3217.13
  Bottom Layer w15: SW1.1 3391.38,3191.38 v1(3391.38,3215.62) ; v1(3476.9,3216.54) 3571.16,3216.54 v1(3573.79,3219.16)
TXD0: D2.2 U1.35 U3.3 | length 591.7
  Top Layer w15: v1(4194.58,3341.2) 4194.58,3361.94 4214.51,3381.88 4268.12,3381.88 U1.35 ; v1(4335.63,3295.49) 4335.63,3297.96 4359.28,3321.61 4402.88,3321.61 4506.03,3424.76 4506.03,3503.59 D2.2
  Bottom Layer w15: v1(4194.58,3341.2) 4194.58,3317.33 4216.42,3295.49 v1(4335.63,3295.49)
VCC3.3: C3.2 C4.2 R1.2 R2.2 R5.2 R11.1 R23.2 U1.2 U2.5 | length 3569.5
  Top Layer w30: U1.2 3659.38,3475 3782.66,3598.28 v2(3784.89,3598.28) ; v2(3652.67,3156.03) 3697.66,3111.04 v2(4106.79,3111.04) ; v2(3784.35,3656.3) 3785.66,3654.99 3785.66,3627.84 v2(3785.08,3627.26) ; v2@3784.89,3627.26 v2(3784.89,3598.28) ; v2@4107.15,3567.39 4108.62,3568.85 4108.62,3598.03 4139.16,3598.03 v2(4139.58,3597.6) 4139.98,3598 4327,3598 4359,3566 4360.13,3566 R11.1 ; v2(4107.61,3598.03) 4072.47,3598.03 v2(4071.16,3596.72) 4069.6,3598.28 v2(3784.89,3598.28) ; v2(4227.87,2501.54) C3.2@4227.87,2532.93 ; C3.2 4227.15,2533.7 4227.15,2617.21 C4.2 ; C3.2@4243.07,2542.66 4362.38,2542.66 4368.69,2536.35 R1.2 ; 4321.65,2544.31 U2.5
  Bottom Layer w30: R23.2 3485.42,3155.07 3497.09,3155.07 3498.06,3156.03 v2(3652.67,3156.03) ; R5.2 3739.19,3820.12 3740.07,3821 3749.89,3821 3784.89,3856.01 ; R2.2 3784.89,3856.01 ; v2(3844.59,3599.11) 3843.71,3600 3786.72,3600 3784.99,3598.28 v2(3784.89,3598.28) 3784.89,3856.01 ; v2(4071.16,3596.72) 4082.15,3596.72 4083.46,3598.03 v2(4107.61,3598.03) v2@4107.95,3597.69 ; v2(4107.31,3568.33) 4107.31,3111.57 v2(4106.79,3111.04) 4106.79,2677.3 4144.6,2639.48 4144.6,2638.78 4266.11,2517.28 v2(4266.11,2501.64) ; v2@4108.18,3568.33 4108.18,3597.46 v2@4107.95,3597.69 ; v2(4139.58,3597.6) 4139.49,3597.69 v2@4107.95,3597.69 ; v2(4227.87,2501.54) v2@4227.97,2501.64
  other v2: 3814.46,3598
VCC5_IN: C1.2 C6.1 C8.1 C9.1 C14.1 C15.1 U2.1 U2.3 U3.16 U4.3 U5.1 U5.2 串口下载.2 | length 2676.9
  Top Layer w15: C14.1@3685.12,2569.36 C14.1
  Top Layer w25: U5.1 U5.2 3711.47,2690 ; U2.1@4421.2,2630.8 U2.1@4423.54,2628.46 ; U2.3 4423.54,2746.26 4425,2747.72
  Top Layer w30: U5.1 U5.1@3683.55,2652.6 ; C15.1 3687.05,2457.22 3687.05,2552.57 C14.1 ; 3711.47,2690 3713.66,2690 3780.96,2757.29 4420.87,2757.29 4421.89,2756.27 4546.37,2756.27 v2(4548.21,2758.11) 4580.8,2758.11 v2(4582.36,2759.66) ; U2.1@4423.54,2628.46 4423.54,2580.97 4436.79,2567.73 v2(4445.25,2567.73) ; C6.1 4497.93,3596.35 4497.97,3596.3 4506.71,3587.56 4515.5,3578.77 4568.84,3525.43 ; 4504.25,2746.01 4504.25,2715.87 C1.2 ; 4568.86,3525.41 4568.92,3525.35 ; 4568.97,3525.31 4571.31,3522.96 cw(c3930,3120) v2(4605.45,3462.67) ; v2(4605.45,3462.67) 4605.45,3420.34 U3.16
  Bottom Layer w25: v2@3676.5,2605 v2@3715,2605 ; C9.1@4470.59,2625.22 C8.1@4541.75,2696.38
  Bottom Layer w30: 串口下载.2 3470.95,2604.54 3470.99,2604.58 v2(3676.5,2604.58) ; v2(4445.25,2567.73) 4459.37,2581.85 4459.37,2616.22 C9.1@4460.87,2617.72 ; C8.1 4545.75,2710.75 4545.75,2755.65 4549.76,2759.66 v2(4582.36,2759.66) 4582.36,2817.49 U4.3 ; U4.3@4585.81,2821.16 4585.81,2855.06 4641.73,2910.99 4641.73,3366.23 4615.35,3439.24 v2(4605.45,3462.67)
  other v2: 3708.89,2605.09
VCC_recharge: R4.2 USB.B4A9 | length 971.8
  Top Layer w25: R4.2 R4.2@3460.88,3015.88 ; USB.B4A9@4024.33,2614.86 4024.33,2573.64 4040.08,2557.89 v2(4040.08,2556.69)
  Top Layer w30: R4.2@3460.88,3015.88 3460.88,3014.61 3461.52,3014.61 3477.67,2998.46 v2(3477.67,2996.55)
  Bottom Layer w30: v2(3477.67,2996.55) 3480.28,2993.94 3576.06,2993.94 3852.5,2717.5 3852.5,2566.54 3853.32,2565.72 3853.32,2550.76 3891.49,2512.58 3997.36,2512.58 4040.08,2555.3 v2(4040.08,2556.69)
pads on no net: SW1.3 SW1.4 U1.4 U1.5 U1.6 U1.8 U1.9 U1.13 U1.14 U1.16 U1.17 U1.18 U1.19 U1.20 U1.21 U1.22 U1.23 U1.27 U1.28 U1.31 U1.32 U1.33 U1.36 U1.39 U3.7 U3.8 U3.9 U3.10 U3.11 U3.12 U3.15 U5.3 U6.9 USB.A5 USB.A8 USB.B5 USB.B6 USB.B7 USB.B8 USB.EP
copper on no net:
  other v1: 3864.02,2368.94 3886.52,2368.59 3984.91,2369.16 3962.41,2369.51 3875.29,2387.43 3852.48,2388.1 3897.94,2387.87 3973.68,2388 3996.34,2388.43 3950.87,2388.66 3864.77,2406.9 3886.88,2407.07 3963.16,2407.47 3985.27,2407.63 4031.23,2416.16 4008.73,2416.51 3817.71,2418.85 3840.21,2418.5 3912.71,2418.85 3935.21,2418.5 4020,2435 4042.66,2435.43 3997.19,2435.67 3828.98,2437.34 3923.98,2437.34 3806.17,2438.01 3851.64,2437.78 3901.17,2438.01 3946.64,2437.78 4009.48,2454.47 4031.59,2454.63 3818.46,2456.82 3840.57,2456.98 3913.46,2456.82 3935.57,2456.98 3887.71,3213.85 3910.21,3213.5 3898.98,3232.34 3876.17,3233.01 3921.64,3232.78 3888.46,3251.82 3910.57,3251.98 4036.23,3316.16 4013.73,3316.51 4025,3335 4047.66,3335.43 4002.19,3335.67 3847.71,3343.85 3870.21,3343.5 3932.71,3343.85 3955.21,3343.5 4014.48,3354.47 4036.59,3354.63 3858.98,3362.34 3943.98,3362.34 3836.17,3363.01 3881.64,3362.78 3921.17,3363.01 3966.64,3362.78 3848.46,3381.82 3870.57,3381.98 3933.46,3381.82 3955.57,3381.98 4002.71,3393.85 4025.21,3393.5 4013.98,3412.34 3991.17,3413.01 4036.64,3412.78 4003.46,3431.82 4025.57,3431.98 3837.71,3473.85 3860.21,3473.5 3848.98,3492.34 3826.17,3493.01 3871.64,3492.78 3838.46,3511.82 3860.57,3511.98 3417.71,3618.85 3440.21,3618.5 3527.71,3618.85 3550.21,3618.5 3662.71,3618.85 3685.21,3618.5 3428.98,3637.34 3538.98,3637.34 3673.98,3637.34 3406.17,3638.01 3451.64,3637.78 3516.17,3638.01 3561.64,3637.78 3651.17,3638.01 3696.64,3637.78 3418.46,3656.82 3440.57,3656.98 3528.46,3656.82 3550.57,3656.98 3663.46,3656.82 3685.57,3656.98 3892.71,3688.85 3915.21,3688.5 3527.71,3693.85 3550.21,3693.5 3662.71,3693.85 3685.21,3693.5 3903.98,3707.34 3881.17,3708.01 3926.64,3707.78 3538.98,3712.34 3673.98,3712.34 3516.17,3713.01 3561.64,3712.78 3651.17,3713.01 3696.64,3712.78 3893.46,3726.82 3915.57,3726.98 3528.46,3731.82 3550.57,3731.98 3663.46,3731.82 3685.57,3731.98 4257.71,3743.85 4280.21,3743.5 4268.98,3762.34 4246.17,3763.01 4291.64,3762.78 3852.71,3773.85 3875.21,3773.5 4258.46,3781.82 4280.57,3781.98 3863.98,3792.34 3841.17,3793.01 3886.64,3792.78 3853.46,3811.82 3875.57,3811.98

## Polygon pours and split planes (outlines as drawn)
no net on Top Layer "NONET_L01_P000" (solid, pour order 0): 769 vertices, not listed, extent 3142.4,2333.81 4717.36,3908.05
no net on Bottom Layer "NONET_L02_P001" (solid, pour order 1): 725 vertices, not listed, extent 3141.41,2332.53 4718.53,3910.18

## Keep-outs
Keep-Out Layer:
  circle w10: c3930,3120 r787.4

## Other copper
Top Layer:
  rectangle net GND: 3485,3475 3532.43,3545
  rectangle net GND: 3359.49,3350 3532.43,3502.9
  rectangle net GND: 3624.74,2820.35 3722.29,2882
  rectangle net BAT+: 3370,3141.67 3481.27,3195
  rectangle net VCC3.3: 4215.99,2485.5 4284.62,2545.19
  rectangle net VCC3.3: 4215.99,2545.19 4343.34,2642.61
  rectangle net VCC5_IN: 3661.85,2439.28 3728.09,2705
  rectangle net GND: 3570.47,2439.39 3650.97,2475
  rectangle net GND: 3550,2469.02 3650.96,2510
  rectangle net GND: 3484.83,2506.37 3650.97,2602.58
  rectangle net GND: 4110,2655 4205,2729.59
Bottom Layer:
  rectangle net GND: 4345,2645 4420,2708.59
  rectangle net +3.3V_S: 4384,2804.5 4451.19,2843.81
  rectangle net GND: 4501.94,3124.09 4587.47,3165
  rectangle net VCC3.3: 4210,2505 4246.4,2555
  rectangle net VCC3.3: 4210,2485 4285.15,2528.22
  rectangle net GND: 4164.44,2655 4230,2712.03
  rectangle net GND: 4461.59,2693.87 4507.34,2798.49

## Silkscreen, mask and mechanical layers (free items; w line width, h text height)
Top Overlay:
  text "+" at 3235,3368.78 h60
Bottom Solder:
  text "+" at 3235,3368.78 h60

## Text inside footprints (layer, text, board x,y; h text height)
串口下载: Bottom Overlay "ON" at 3469.1,2812.61 h19.47 r90
电池供电: Bottom Overlay "ON" at 3334.1,2887.61 h19.47 r90